# Altium PCB PCB1.PcbDoc (part 2 of 2)
Units mil, origin at the board's own origin, x right, y up, seen from the top; angles counter-clockwise.
Board outline 3937.01 x 3937.01 mil, 4 copper layers (Top Layer, Int1 (GND), Int2 (PWR), Bottom Layer), stack 61.754 mil thick; 139 components, 114 nets, 575 pads, 284 vias.
Unrouted connection lines stored in the file: 12.
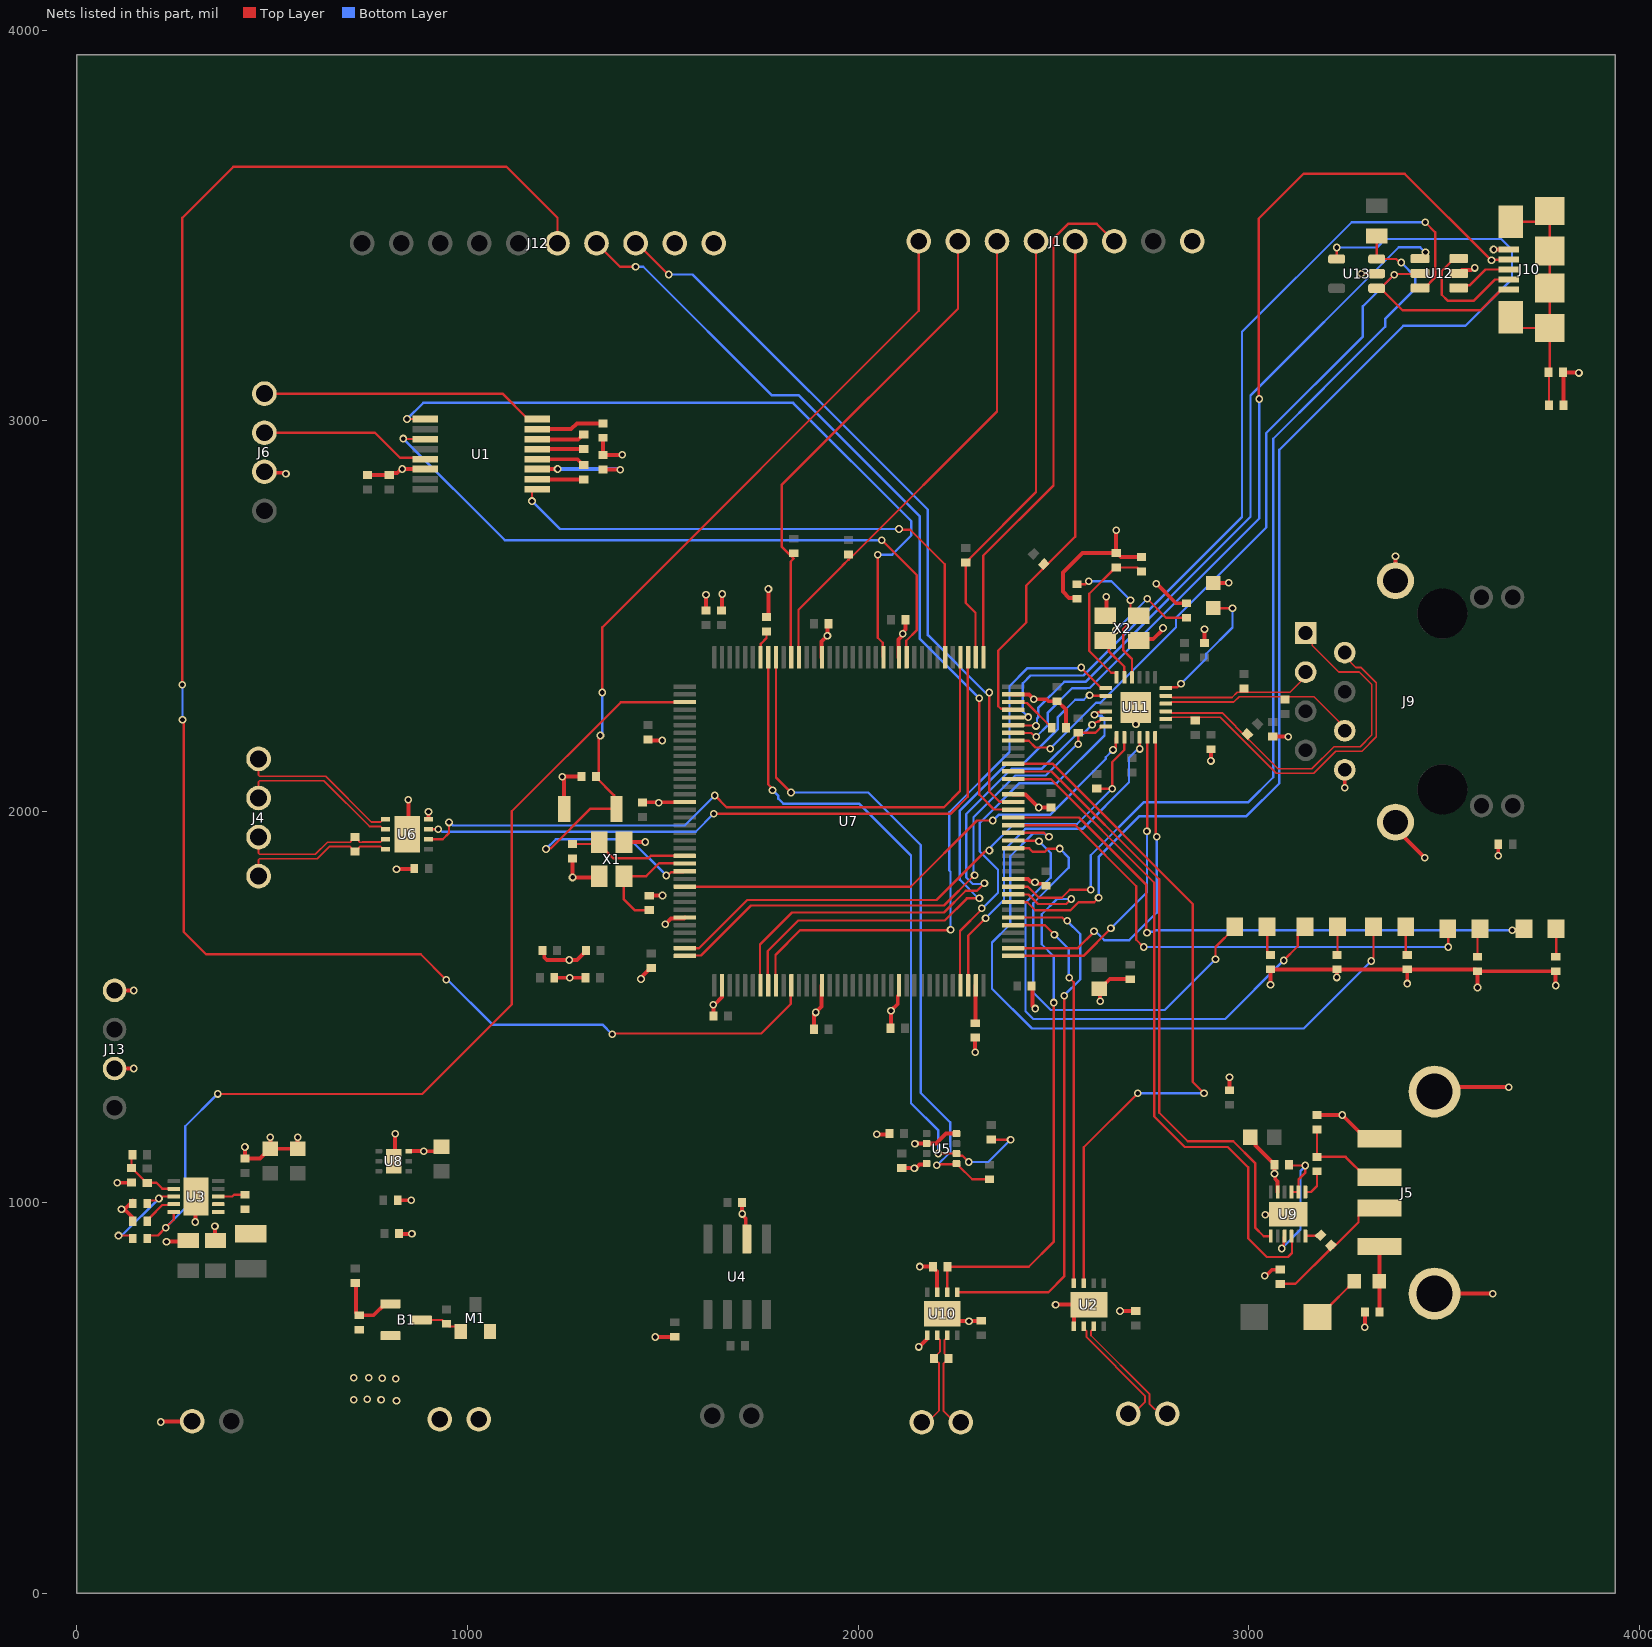
[diagram p4: the nets of this part, all layers, seen from the top]

## Via types
v1: diameter 19.68, hole 11.81, Top Layer to Bottom Layer, tented both sides, 284 vias

## Nets (pads, with @x,y where several pads share a name; then routed paths per layer and width w, separated by ;. In a path a pad name is that pad's centre, name@x,y a point inside that pad or via, vN(x,y) a via of type N, cw(c..) or ccw(c..) an arc to the next point about the centre after c; other vN are vias at no path point) (continued)
EXT_PB1: J12.6 U7.47 | length 4704.4
  Top Layer w5.94: v1(270,2325) 270,3520 400.59,3650.59 1099.41,3650.59 1230,3520 J12.6@1230,3455 ; v1(270.41,2235.11) 273.43,2232.09 273.43,1692.12 330.71,1634.84 880.16,1634.84 v1(945,1570) ; v1(1370,1430) 1372.09,1432.09 1751.83,1432.09 1827.36,1507.62 U7.47@1827.36,1554.92
  Bottom Layer w5.94: v1(270,2325) 270.41,2324.59 v1(270.41,2235.11) ; v1(945,1570) 948.7,1570 1063.7,1455 1345,1455 v1(1370,1430)
EXT_PG7: J12.7 U7.92 | length 1993.9
  Top Layer w5.94: J12.7@1330,3455 1390,3395 v1(1430,3395) ; v1(2310,2290) 2310,2043.35 2347.62,2005.73 2393.88,2005.73 U7.92@2395.08,2004.53
  Bottom Layer w5.94: v1(1430,3395) 1449.37,3395 1778.22,3066.15 1847.23,3066.15 2157.69,2755.7 2157.69,2442.31 v1(2310,2290)
EXT_PG8: J12.8 U7.93 | length 1893.9
  Top Layer w5.94: J12.8@1430,3455 1433.36,3455 1513.36,3375 v1(1515,3375) ; v1(2335,2305) 2335,2051.99 2361.58,2025.42 2393.88,2025.42 U7.93@2395.08,2024.21
  Bottom Layer w5.94: v1(1515,3375) 1575.79,3375 2178.15,2772.64 2178.15,2451.85 2325,2305 v1(2335,2305)
GND: B1.2 C1.1 C2.1 C4.1 C5.1 C7.1 C8.1 C9.1 C10.1 C11.1 C12.2 C13.1 C14.1 C17.2 C18.1 C19.1 C20.1 C21.2 C22.2 C23.1 C24.1 C25.2 C26.2 C27.1 C28.1 C29.1 C30.1 C31.1 C32.1 C33.1 C34.1 C35.1 C36.2 C37.2 C38.2 C39.2 C40.2 C41.2 C42.2 C43.2 C44.2 C45.2 C46.2 C47.2 C48.2 C49.1 C50.2 C51.2 C52.1 C53.1 C54.1 C55.1 C56.2 C57.1 C58.1 C59.1 C60.1 C61.1 C62.1 C63.1 C64.2 J1.8 J5.04 J5.SH J6.2 J8.2 J9.8 J9.S1 J9.S2 J10.5 J11.2 J12.9 J12.10 J13.2 J13.4 R3.1 R11.2 R14.1 R20.2 R21.1 R26.2 R30.1 R32.1 R33.1 R34.1 R35.1 R36.1 SW2.1 U1.14 U2.5 U3.11 U4.2 U5.1 U5.5 U5.7 U6.4 U6.9 U7.16 U7.31 U7.38 U7.51 U7.61 U7.83 U7.94 U7.107 U7.120 U7.130 U8.3 U9.5 U9.13 U10.3 U10.5 U11.25 U12.2 U13.2 X1.2 X1.4 X2.2 X2.4 | length 7385
  Top Layer w5.94: U11.25@2710.47,2266.77 2710.63,2266.61 v1(2710.63,2223.43) ; v1(3287.4,3376.97) U13.2@3326.77,3376.97
  Top Layer w10: J13.2@96.46,1342.52 v1(145.67,1342.52) ; J13.4@96.46,1542.52 96.56,1542.42 145.57,1542.42 v1(145.67,1542.32) ; v1(103.44,1050.27) 137.68,1050.27 137.99,1050.59 R3.1@139.76,1050.59 ; C12.2@142.99,960 142.99,961.77 125.11,979.65 116.8,979.65 v1(114.17,982.28) 116.8,984.91 124.68,984.91 142.99,1003.23 C17.2@142.99,1005 ; v1(215,438) 216,439 294,439 J11.2@295,440 ; v1(229.33,899.61) 282.44,899.61 C14.1@285,902.17 ; v1(303.15,949.8) 303.15,1013.15 U3.11@305,1015 ; v1(353.35,938.98) 353.35,903.82 C13.1@355,902.17 ; v1(430.12,1141.73) v1(430.12,1141.73) 430.06,1112.07 C11.1@430,1112.01 468.23,1112.01 493.43,1137.2 C10.1@495,1137.2 ; J6.2@480,2870 482.5,2867.5 532.5,2867.5 v1(535,2865) ; v1(495.08,1166.34) 495.08,1137.28 C10.1@495,1137.2 ; v1(564.96,1166.34) C9.1@565,1137.2 C9.1@565,1137.2 C10.1@495,1137.2 ; C5.1@744.09,2861.81 C4.1@799.21,2861.81 804.25,2866.85 819.94,2866.85 830.06,2876.97 v1(832.68,2876.97) ; U8.3@811.11,1105.59 814.5,1108.98 v1(814.5,1175.5) ; v1(818.11,1852.36) 819.09,1853.35 862.6,1853.35 C21.2@863.58,1854.33 ; C23.1@821.11,1005.59 821.2,1005.5 v1(856,1005.5) ; C33.1@824.62,920.59 825.71,919.5 v1(857.5,919.5) ; v1(832.68,2876.97) U1.14@892,2877 ; U6.9@845.12,1942.2 848.43,1945.51 v1(848.43,2030.51) ; U8.3@849.5,1131.18 849.64,1131.04 887.66,1131.04 v1(887.8,1130.91) 922.05,1130.91 C24.1@933.07,1141.93 ; v1(900,2000) 900,1980.83 U6.4@900.24,1980.59 ; C54.1@1191.5,1645 1196.2,1640.3 1196.2,1626.64 1202.62,1620.22 1279.98,1620.22 1302.99,1643.23 C55.1@1302.99,1645 ; C53.1@1222.01,1575 C52.1@1301.5,1575 ; SW2.1@1247.05,2006.89 1247.05,2080.93 1242.13,2085.85 v1(1242.13,2089.57) 1291.06,2089.57 C31.1@1291.5,2090 ; C35.1@1268.7,1880.12 v1(1268.7,1831.69) 1333.7,1831.69 X1.2@1337.01,1835 ; C7.1@1346.46,2956.89 C2.1@1346.46,2913.19 1346.56,2913.29 1395.57,2913.29 v1(1395.67,2913.39) ; X1.4@1400,1921.61 1400.63,1922.24 v1(1454.72,1922.24) ; v1(1443.9,1571.85) 1446.53,1574.48 1446.53,1578.3 1468.23,1600 C44.2@1470,1600 ; C41.2@1447.83,2023.43 1448.62,2024.21 U7.16@1554.92,2024.21 ; C51.2@1461.61,2184.45 1463.98,2182.09 v1(1498.03,2182.09) ; C34.1@1465,1785 1465.43,1785.43 v1(1499.02,1785.43) ; v1(1480.32,655.51) 1480.56,655.75 1529.76,655.75 C20.1@1530,655.99 ; v1(1505.91,1711.61) 1521.08,1726.79 1553.56,1726.79 U7.31@1556.1,1729.33 ; C37.2@1610,2514.51 1610.24,2514.74 v1(1610.24,2555.12) ; C43.2@1629.13,1477.36 1628.94,1477.56 v1(1628.94,1505.91) 1631.56,1505.91 1650.87,1525.21 1650.87,1554.8 U7.38@1651.38,1555.32 ; C38.2@1650.2,2514.51 1651.57,2515.89 v1(1651.57,2557.09) ; C19.1@1702.56,1000 1702.66,999.9 1702.66,970.57 v1(1702.76,970.47) 1702.76,967.85 1711.9,958.71 1711.9,909.41 U4.2@1715,906.31 ; R11.2@1765,2498.5 1770,2503.5 v1(1770,2570) ; C45.2@1887.01,1442.91 1886.81,1443.11 1886.81,1479.57 1890.84,1483.6 v1(1890.84,1486.22) ; v1@1892.86,1488.24 1906.1,1501.48 U7.51@1906.1,1554.92 ; U7.130@1906.1,2395.08 1906.1,2435.1 v1(1921,2450) 1921,2478.57 C39.2@1923.43,2481 ; v1(2047.24,1174.21) 2078.15,1174.21 C18.1@2080.12,1176.18 ; C46.2@2082.87,1445.87 2083.66,1446.65 2083.66,1490.69 2100.96,1507.99 2100.96,1528.72 2103.62,1531.38 U7.61@2103.62,1554.92 ; U7.120@2102.95,2395.08 2102.95,2440.77 2114.17,2451.99 v1(2114.17,2455.71) 2114.17,2459.43 2120.87,2466.12 C36.2@2120.87,2491.14 ; C63.1@2111.22,1087.99 2111.61,1087.6 v1(2143.7,1087.6) 2147.42,1087.6 2156.44,1096.62 2172.21,1096.62 U5.5@2175,1099.41 ; v1(2145,1150) 2145.3,1150.3 2174.7,1150.3 U5.7@2175,1150.59 2198.51,1150.59 2224.1,1176.18 U5.1@2251.38,1176.18 ; v1(2155,630) 2175.51,650.51 2175.51,658.78 U10.5@2176.61,659.88 ; v1(2157.48,835.63) 2190.87,835.63 R14.1@2191.5,835 2191.5,833.23 2201.5,823.23 2201.5,770.83 U10.3@2202.2,770.12 ; U10.5@2215,715 2234.13,695.87 v1(2283.46,695.87) 2284.04,696.44 2314.43,696.44 C1.1@2315,697.01 ; v1(2299.21,1383.86) C32.1@2299.21,1421.65 ; U7.83@2395.08,1827.36 2434.45,1827.36 2440.79,1821.02 2450.55,1821.02 v1(2452.4,1819.17) ; U7.107@2395.08,2299.8 2437.44,2299.8 v1(2449.47,2287.77) 2481.33,2287.77 2486.42,2282.68 C48.2@2508.86,2282.68 2510.63,2282.68 2532.01,2261.3 C22.2@2532.01,2215 ; U7.94@2396.26,2044.29 2396.77,2043.78 2428.45,2043.78 v1(2461.66,2010.57) ; C42.2@2443.7,1554.13 2445.87,1551.97 2445.87,1502.95 v1(2452.76,1496.06) ; v1@2452.4,1820.87 2453.33,1820.87 2458.72,1815.47 2475.28,1815.47 C47.2@2480.32,1810.43 ; v1@2461.38,2010.28 2461.89,2010.79 2492.88,2010.79 C50.2@2493.11,2011.02 ; v1(2504.92,738.19) 2589.81,738.19 U2.5@2590,738 2581.12,738 2551.61,708.49 U2.5@2551.61,682.88 ; C59.1@2560,2545 2557.62,2547.38 2539.32,2547.38 2523.62,2563.08 2523.62,2612.2 2573.43,2662.01 C61.1@2660,2662.01 v1(2660,2720) ; C49.1@2617.13,1546.26 2619.09,1544.29 v1(2619.09,1514.76) ; C49.1@2618.7,1546.26 2643.7,1571.26 C40.2@2695.87,1571.26 ; X2.4@2631.69,2501.5 2635,2504.8 v1(2635,2550) ; C61.1@2661.77,2662.01 2671.77,2652.01 C60.1@2725,2652.01 ; v1(2670,722.01) C8.1@2710,722.01 ; X2.2@2718.31,2438.5 2721.64,2441.83 2755.01,2441.83 2778.15,2464.97 2778.15,2468.15 v1(2780,2470) ; v1(2762.8,2583.66) 2812.95,2533.5 C62.1@2840,2533.5 ; C58.1@2885.24,2432.99 2886.22,2433.98 v1(2886.22,2466.97) ; v1(2902.56,2129.92) C56.2@2902.56,2159.84 ; R26.2@2908.46,2585.2 2908.9,2585.63 v1(2947.83,2585.63) ; C28.1@2950,1287.01 v1(2950,1320) ; C29.1@3002.76,1166.5 3016.26,1152.99 3016.26,1145.59 3058.54,1103.31 3060.32,1103.31 3065.35,1098.27 C30.1@3065.35,1096.5 ; v1(3040,812.19) 3041.85,814.04 3045.57,814.04 3059.05,827.52 3079.01,827.52 C27.1@3080,828.5 ; v1(3041.34,968.5) 3098.5,968.5 U9.13@3100,970 ; v1(3055.12,1557.09) 3055.12,1596.38 R32.1@3055,1596.5 R33.1@3225,1596.5 ; C57.1@3061.22,2192.13 3100.2,2192.13 v1(3100.39,2191.93) ; C30.1@3065.35,1094.72 v1(3065.35,1073.23) 3067.21,1071.37 3067.21,1060.04 3073.43,1053.82 U9.5@3073.43,1026.5 ; C26.2@3172.36,1225 C26.2@3173.86,1223.5 v1(3238.7,1223.5) 3299.41,1162.8 J5.04@3334.06,1162.8 ; v1(3225,1575.75) R33.1@3225,1596.5 ; v1(3245.08,2061.02) J9.8@3245.08,2107.13 ; v1(3296.26,680.12) 3296.46,680.32 3296.46,719.29 C25.2@3296.65,719.49 ; J9.S1@3375,1973.07 3375,1956.92 v1(3450,1881.92) ; J9.S2@3375,2591.18 v1(3375,2653.54) ; v1(3405,1560) R34.1@3405,1596.5 ; J5.SH@3475,766.34 v1(3623.66,766.34) ; J5.SH@3475,1283.66 3486.34,1295 v1(3665,1295) ; U12.2@3536.61,3377.95 3545.26,3386.6 3568.9,3386.6 3574.04,3391.73 v1(3577.76,3391.73) ; v1(3585,1550) R35.1@3585,1591.5 ; v1(3625.98,3438.98) J10.5@3664.67,3438.96 ; v1(3637.8,1886.81) 3637.99,1887.01 3637.99,1916.14 R21.1@3638.19,1916.34 ; v1(3785,1555) R36.1@3785,1591.5 R35.1@3585,1591.5 ; C64.2@3805,3040 3805,3123.5 R30.1@3803.5,3125 3804.49,3124.02 3843.5,3124.02 v1(3844.49,3123.03) ; R33.1@3225,1596.5 R34.1@3405,1596.5 ; R34.1@3405,1596.5 3580,1596.5 R35.1@3585,1591.5
  other v1: 817.91,492.13 708.66,495.08 778.54,495.08 742.96,495.86 815.94,548.23 781.5,550.2 708.66,551.18 747.05,551.18 2083.66,1490.16 1261.75,1575 1260.56,1620.22 1489.17,2022.64
I2C_SCL: R10.1 U5.4 U7.136 | length 1763.2
  Top Layer w5.94: U7.136@1789.17,2395.47 1789.17,2087.8 v1(1827.76,2049.21) ; v1(2200.65,1095) 2202.85,1097.2 2249.17,1097.2 U5.4@2251.38,1099.41 2252.17,1099.41 2258.05,1093.52 2258.05,1092.73 2291.73,1059.06 R10.1@2328.71,1059.06
  Bottom Layer w5.94: v1(1827.76,2049.21) 2025.59,2049.21 2160,1914.8 2160,1279.96 2235.24,1204.72 2235.24,1128.41 2201.83,1095 v1(2200.65,1095)
I2C_SDA: R9.1 U5.3 U7.137 | length 1831.3
  Top Layer w5.94: U7.137@1769.49,2395.47 1769.49,2069.86 1780.51,2058.84 v1(1780.51,2055.12) ; v1(2205,1125) U5.3@2251.38,1125 2257.27,1119.11 2266.72,1119.11 v1(2282.48,1103.35) ; R9.1@2340.55,1160.83 2340.94,1160.43 v1(2389.76,1160.43)
  Bottom Layer w5.94: v1(1780.51,2055.12) 1795.5,2040.13 1795.5,2033.03 1807.86,2020.67 2001.97,2020.67 2135,1887.64 2135,1253.78 2205,1183.78 v1(2205,1125) ; v1(2282.48,1103.35) 2332.68,1103.35 v1(2389.76,1160.43)
JTDI: J1.4 R15.1 U7.110 | length 1150.8
  Top Layer w5.94: U7.110@2299.8,2395.08 2299.8,2509.22 2275,2534.02 R15.1@2275,2637.95 2276.77,2637.95 2283.84,2645.02 2283.84,2646.79 2455,2817.95 J1.4@2455,3460
JTDO: J1.3 R17.1 U7.133 | length 1275.5
  Top Layer w5.94: U7.133@1847.05,2395.08 1847.05,2517.05 1959.66,2629.66 1959.66,2630.45 1974.21,2645 1975,2645 ; 1975.79,2645 2355,3024.21 J1.3@2355,3460
LED_1: D1.1 U7.87 | length 1183.8
  Top Layer w5.94: U7.87@2396.65,1906.1 2396.75,1906 2437.47,1906 2445.95,1897.53 2477.95,1897.53 2485.93,1905.51 2515.26,1905.51 v1@2515.75,1906 ; v1(2914.37,1622.05) 2914.37,1653.74 2963.66,1703.03 D1.1@2963.66,1705
  Bottom Layer w5.94: v1(2515.75,1905.51) 2538.39,1882.87 2538.39,1856.3 2447.83,1765.75 2447.83,1536.97 2492.62,1492.19 2784.51,1492.19 v1(2914.37,1622.05)
LED_2: D2.1 U7.88 | length 1379.5
  Top Layer w5.94: U7.88@2397.44,1926.18 2398.43,1925.2 2461.61,1925.2 v1(2462.6,1924.21) ; v1(3088.58,1619.09) 3124.98,1655.49 3124.98,1686.32 D2.1@3143.66,1705
  Bottom Layer w5.94: v1(2462.6,1924.21) 2492.67,1894.14 2492.67,1831.25 2428.05,1766.64 2428.05,1489.27 2447.83,1469.49 2938.98,1469.49 v1(3088.58,1619.09)
LED_3: D3.1 U7.89 | length 1755
  Top Layer w5.94: U7.89@2396.26,1945.87 2474.63,1945.87 2484.47,1936.02 v1(2488.19,1936.02) ; v1(3312.99,1617.8) 3312.99,1621.52 3318.66,1627.19 D3.1@3318.66,1705
  Bottom Layer w5.94: v1(2488.19,1936.02) 2484.47,1936.02 2476.5,1943.99 2446.95,1943.99 2388.78,1885.83 2388.78,1711.65 2342.42,1665.3 2342.42,1546.76 2444.3,1444.88 3140.07,1444.88 v1(3312.99,1617.8)
LED_4: D4.1 U7.90 | length 1370.3
  Top Layer w5.94: U7.90@2396.26,1965.55 2555.12,1965.55 2711.61,1809.06 2711.61,1672.24 v1(2730.32,1653.54) ; D4.1@3508.66,1700 3510.15,1698.51 v1(3510.15,1653.54)
  Bottom Layer w5.94: v1(2730.32,1653.54) v1(3510.15,1653.54)
LED_5: D5.1 U7.91 | length 1504.5
  Top Layer w5.94: U7.91@2396.26,1985.24 2564.68,1985.24 2737.33,1812.59 2737.33,1691.79 v1(2738.96,1690.16) ; v1(3674.21,1696.85) 3700.51,1696.85 D5.1@3703.66,1700
  Bottom Layer w5.94: v1(2738.96,1690.16) 2741.59,1692.79 2756.62,1692.79 2760.68,1696.85 v1(3674.21,1696.85)
NetB1_1: B1.1 R19.2 R20.1 | length 179.8
  Top Layer w10: R19.2@712.5,794 714.27,792.23 714.27,718.08 721.34,711.01 759.14,711.01 788.13,740 B1.1@802.5,740
NetB1_3: B1.3 M1.1 R18.2 | length 112.8
  Top Layer w5.94: B1.3@882.46,699 934.27,699 944.09,689.17 R18.2@945.87,689.17 952.94,682.1 969.88,682.1 982.7,669.29 M1.1@982.7,669
NetC2_2: C2.2 U1.3 | length 258.4
  Top Layer w10: U1.3@1178,2877 v1(1230.32,2876.97) ; C2.2@1346.46,2876.18 1347.05,2875.59 1390.16,2875.59 v1(1390.75,2875)
  Bottom Layer w10: v1(1230.32,2876.97) 1369.09,2876.97 1369.21,2876.85 1388.89,2876.85 v1(1390.75,2875)
NetC3_1: C3.1 U1.4 | length 125.3
  Top Layer w5.94: C3.1@1295.47,2887.4 C3.1@1297.24,2887.4
  Top Layer w10: U1.4@1178,2902 1280.87,2902 C3.1@1295.47,2887.4
NetC3_2: C3.2 U1.2 | length 119.5
  Top Layer w10: U1.2@1178,2851 1178.3,2850.7 1296.94,2850.7 C3.2@1297.24,2850.39
NetC6_1: C6.1 U1.6 | length 124.3
  Top Layer w10: U1.6@1178,2953 1283.32,2953 1295.47,2965.16 C6.1@1297.24,2965.16
NetC6_2: C6.2 U1.5 | length 119.3
  Top Layer w10: U1.5@1178,2928 1178.07,2928.07 C6.2@1297.24,2928.15 C6.2@1297.24,2928.15
NetC7_2: C7.2 U1.7 | length 174.6
  Top Layer w10: U1.7@1178,2979 1265.12,2979 1280.02,2993.9 C7.2@1346.46,2993.9
NetC12_1: C12.1 U3.4 | length 83.3
  Top Layer w5.94: C12.1@180,960 186.38,960 186.99,960.61 186.99,961.6 218.56,993.17 245.96,993.17 U3.4@248.11,995.32
NetC15_2: C15.2 R1.2 R3.2 U3.2 | length 166.9
  Top Layer w5.94: R3.2@139.34,1088.03 R3.2@139.76,1087.6 139.76,1119.09 R1.2@142.72,1122.05 ; R3.2@139.77,1088.46 178.23,1050 C15.2@180,1050 203.5,1050 218.82,1034.68 U3.2@248.11,1034.68
NetC16_1: C16.1 L1.1 U3.6 U3.7
NetC16_2: C16.2 U3.8 | length 70
  Top Layer w5.94: U3.8@361.89,1015 397.5,1015 402,1019.5 C16.2@430,1019.5
NetC17_1: C17.1 R2.1 U3.3 | length 254.9
  Top Layer w5.94: v1(106.5,915) 135.84,915 142.91,907.93 R2.1@142.91,907.48 ; C17.1@180,1005 201.28,1005 206.28,1010 213.72,1010 218.72,1015 U3.3@248.11,1015
  Bottom Layer w5.94: v1(106.5,915) 109.13,917.63 117.63,917.63 v1(210,1010)
NetC22_1: C22.1 U7.106 | length 126.9
  Top Layer w5.94: U7.106@2396.26,2280.51 2398.8,2277.97 2432.03,2277.97 2486.16,2223.84 2487.93,2223.84 2495,2216.77 C22.1@2495,2215
NetC30_2: C30.2 U9.2 U9.3 U9.9 | length 408.3
  Top Layer w5.94: v1(3083.66,881.89) 3083.66,885.61 3089.19,891.14 3089.19,911.55 U9.9@3091.14,913.5 ; C30.2@3102.36,1096.5 3104.46,1094.4 v1(3144.4,1094.4) 3144.4,1076.25 3126.57,1058.43 U9.2@3126.57,1026.5 U9.3@3108.86,1026.5
  Bottom Layer w5.94: v1(3083.66,881.89) 3132.03,930.26 3132.03,1080.24 3144.4,1092.61 v1(3144.4,1094.4)
NetC32_2: C32.2 U7.71 | length 96.5
  Top Layer w10: C32.2@2299.21,1458.66 2299.51,1458.96 2299.51,1554.63 U7.71@2299.8,1554.92
NetC59_2: C59.2 U11.4 X2.3 | length 393.3
  Top Layer w5.94: C59.2@2560,2582.01 2580.72,2582.01 2588.71,2590 v1(2590,2590) ; v1(2696.85,2541.34) 2696.85,2520.18 X2.3@2713.97,2503.06 ; U11.4@2700.63,2343.54 2700.63,2390.94 2677.78,2413.8 2677.78,2466.87 2712.4,2501.5 X2.3@2718.31,2501.5
  Bottom Layer w5.94: v1(2590,2590) 2648.19,2590 v1(2696.85,2541.34)
NetC60_2: C60.2 C61.2 U11.6 | length 416.1
  Top Layer w5.94: U11.6@2661.26,2343.54 2661.26,2353.26 2659.11,2355.41 2647.23,2355.41 2591.16,2411.48 2591.16,2557.94 2658.23,2625 C61.2@2660,2625 2713.23,2625 2723.23,2615 C60.2@2725,2615
NetC62_2: C62.2 U11.5 X2.1 | length 390.1
  Top Layer w5.94: v1(2658.81,2463.84) 2656.28,2461.32 2656.28,2457.19 2637.6,2438.5 X2.1@2631.69,2438.5 2640.75,2429.45 2640.75,2411.42 2680.94,2371.22 U11.5@2680.94,2343.54 ; v1(2739.71,2544.74) 2787.95,2496.5 C62.2@2840,2496.5
  Bottom Layer w5.94: v1(2658.81,2463.84) v1(2739.71,2544.74)
NetC64_1: C64.1 J10.SH1 J10.SH2 J10.SH3 J10.SH4 J10.SH5 J10.SH6 R30.2 | length 723.1
  Top Layer w5.94: J10.SH1@3669.61,3265.71 3697.17,3238.15 J10.SH3@3770,3238.15 ; J10.SH2@3669.61,3509.8 3742.44,3509.8 J10.SH6@3770,3537.36 J10.SH5@3770,3435 J10.SH4@3770,3340.51 J10.SH3@3770,3238.15 ; C64.1@3767.99,3040 3767.99,3123.5 R30.2@3766.5,3125 3770,3128.5 J10.SH3@3770,3238.15
NetD1_2: D1.2 R32.2 | length 76
  Top Layer w5.94: D1.2@3046.34,1705 3046.34,1640.57 3053.41,1633.5 R32.2@3055,1633.5
NetD2_2: D2.2 R33.2 | length 72.1
  Top Layer w5.94: R33.2@3225,1633.5 3226.34,1634.84 D2.2@3226.34,1705
NetD3_2: D3.2 R34.2 | length 73
  Top Layer w5.94: D3.2@3401.34,1705 3401.34,1637.17 R34.2@3405,1633.5
NetD4_2: D4.2 R35.2 | length 74.1
  Top Layer w5.94: R35.2@3585,1628.5 3585,1693.66 D4.2@3591.34,1700
NetD5_2: D5.2 R36.2 | length 72.1
  Top Layer w5.94: R36.2@3785,1628.5 3786.34,1629.84 D5.2@3786.34,1700
NetD6_1: D6.1 R6.2 | length 132.7
  Top Layer w5.94: D6.1@3175.2,706.69 3205.69,737.19 3208.53,737.19 3254.23,782.89 3255.02,782.89 3269.57,797.44 R6.2@3269.57,798.23
NetJ8_1: J8.1 M1.2
NetR7_2: R7.2 U9.1 | length 73.5
  Top Layer w5.94: U9.1@3144.29,1026.5 3158.39,1026.5 3173.86,1041.97 R7.2@3173.86,1079.49
NetR8_2: R8.2 U9.12 | length 40.2
  Top Layer w5.94: U9.12@3144.29,913.5 3145.47,914.68 3182.22,914.68 R8.2@3183.48,915.93
NetR11_1: R11.1 U7.138 | length 71.5
  Top Layer w5.94: U7.138@1749.83,2396.28 1750.14,2396.6 1750.14,2429.5 1765,2444.36 R11.1@1765,2461.5
NetR26_1: R26.1 U11.24 | length 340.5
  Top Layer w5.94: U11.24@2787.24,2315.98 2789.39,2318.13 2816.37,2318.13 v1(2825.87,2327.63) ; R26.1@2908.46,2521.1 2908.9,2520.67 v1(2957.68,2520.67)
  Bottom Layer w5.94: v1(2825.87,2327.63) 2890.65,2392.41 2890.65,2404.03 2957.68,2471.06 v1(2957.68,2520.67)
NJTRST: J1.2 R13.1 U7.134 | length 1268.4
  Top Layer w5.94: U7.134@1827.36,2395.08 1827.36,2640.32 1835,2647.95 1834.21,2647.95 1803.72,2678.44 1803.72,2835.86 2255,3287.14 J1.2@2255,3460
NRST: C31.2 J1.1 SW2.2 U7.25 | length 2446.1
  Top Layer w5.94: v1(1200.79,1904.53) 1202.69,1906.43 1213.52,1906.43 1314.96,2007.87 SW2.2@1379.92,2007.87 ; v1(1340,2195) 1340,2193.36 1335.57,2188.93 1335.57,2097.07 C31.2@1328.5,2090 1328.5,2088.23 1375,2041.73 1375,2012.8 SW2.2@1379.92,2007.87 ; v1(1345,2305) 1345,2472.28 2155,3282.28 J1.1@2155,3460 ; SW2.2@1380.91,2006.89 SW2.2@1379.92,2007.87 ; v1(1508.86,1836.61) 1512.58,1836.61 1520.86,1844.9 1552.77,1844.9 U7.25@1554.92,1847.05
  Bottom Layer w5.94: v1(1200.79,1904.53) 1225.39,1929.13 1416.34,1929.13 v1(1508.86,1836.61) ; v1(1340,2195) 1345,2200 v1(1345,2305)
OSC_IN: C35.2 U7.23 X1.1 | length 306.5
  Top Layer w5.94: C35.2@1268.7,1917.13 1332.52,1917.13 X1.1@1337.01,1921.61 ; X1.1@1337.01,1915.71 1355.69,1897.03 1356.66,1897.03 1373.22,1880.47 1462.64,1880.47 1468.98,1886.81 U7.23@1556.1,1886.81
OSC_OUT: C34.2 U7.24 X1.3 | length 305
  Top Layer w5.94: C34.2@1465,1747.99 1427.2,1747.99 1400,1775.2 X1.3@1400,1835 1457.41,1835 1490.23,1867.81 1553.84,1867.81 U7.24@1554.92,1866.73
OTG_FS_D_N: U7.103 U12.4 | length 1801.4
  Top Layer w5.94: U7.103@2395.11,2221.03 2395.67,2220.47 2453.74,2220.47 v1(2454.72,2219.49) ; U12.4@3437.8,3415.35 3443.13,3415.35 3451.77,3424 v1(3451.77,3432.09)
  Bottom Layer w5.94: v1(2454.72,2219.49) 2457.34,2222.1 2457.34,2238.24 2460.31,2241.21 2460.31,2265.43 2527.14,2332.26 2581.27,2332.26 3003.84,2754.83 3003.84,3065.45 3383.27,3444.88 3438.05,3444.88 3450.84,3432.09 v1(3451.77,3432.09)
OTG_FS_D_P: U7.104 U12.6 | length 2130.8
  Top Layer w5.94: U7.104@2395.08,2240.75 2395.96,2241.63 2434.55,2241.63 v1(2435.04,2242.13) ; U12.6@3437.8,3340.55 3450,3340.55 3476.38,3366.93 3476.38,3483.27 v1(3450.93,3508.72)
  Bottom Layer w5.94: v1(2435.04,2242.13) 2421.26,2255.91 2421.26,2328.74 2440.98,2348.46 2576.55,2348.46 2982.28,2754.2 2982.28,2995.08 2982.28,3228.38 3262.77,3508.86 v1@3450.79,3508.86
OTG_FS_ID: J10.4 U7.102 | length 2433.6
  Top Layer w5.94: U7.102@2395.08,2201.38 2442.54,2201.38 2451.95,2191.97 v1(2455.67,2191.97) ; v1(3026.57,3056.1) 3024.61,3058.07 3024.61,3517.72 3139.76,3632.87 3398.4,3632.87 3619.58,3411.69 v1(3620.6,3411.69) 3621.43,3412.52 3663.86,3412.52 J10.4@3664.69,3413.35
  Bottom Layer w5.94: v1(2455.67,2191.97) 2485.24,2221.53 2485.24,2253.94 2547.61,2316.32 2583.83,2316.32 2584.1,2316.58 2592.17,2316.58 3026.57,2750.98 v1(3026.57,3056.1)
Power_Good: R2.2 U3.5 U7.3 | length 2404.3
  Top Layer w5.94: R2.2@180,915 207.32,915 v1(227.72,935.39) 248.11,955.79 U3.5@248.11,975.63 ; U3.5@258.94,975.63 U3.5@261.09,973.48 ; v1(360.24,1277.56) 883.85,1277.56 1113.09,1506.8 1113.09,2000.89 1392.32,2280.12 U7.3@1554.92,2280.12
  Bottom Layer w5.94: v1(227.72,935.39) 277.56,985.24 277.56,1194.88 v1(360.24,1277.56)
RD_N: J9.6 R23.2 U11.22 | length 506.2
  Top Layer w4.44: U11.22@2787.24,2276.61 2798.07,2276.61 2802.19,2280.74 2961.33,2280.74 2974.88,2294.29 3166.34,2294.29 3245.08,2215.55 J9.6@3245.08,2207.13
RD_P: J9.3 R22.2 U11.23 | length 393
  Top Layer w4.44: U11.23@2787.24,2296.3 2798.07,2296.3 2802.19,2292.18 2956.59,2292.18 2970.14,2305.73 3104.94,2305.73 3145.08,2345.87 J9.3@3145.08,2357.13
RMII_CRS_DV: U7.43 U11.11 | length 1419.1
  Top Layer w5.94: U7.43@1748.62,1554.92 1748.62,1660.04 1830.46,1741.88 2219.25,1741.88 2275.19,1797.82 2303.73,1797.82 v1(2322.83,1816.93) ; v1(2598.43,2222.44) 2602.14,2222.44 2609.17,2229.47 2612.4,2229.47 2614.58,2231.65 2617.28,2231.65 2622.87,2237.24 U11.11@2633.7,2237.24
  Bottom Layer w5.94: v1(2322.83,1816.93) 2320.87,1814.96 2293.21,1814.96 2276.03,1832.14 2276.03,1993.55 2392.7,2110.22 2470.41,2110.22 2559,2198.82 2574.8,2198.82 v1(2598.43,2222.44)
RMII_MDC: U7.27 U11.13 | length 1280.7
  Top Layer w5.94: U7.27@1554.92,1807.68 2134.45,1807.68 2304.13,1977.36 v1(2344.49,1977.36) ; v1(2651.93,2158.04) 2659.11,2165.22 2659.11,2187.85 U11.13@2661.26,2190
  Bottom Layer w5.94: v1(2344.49,1977.36) 2358.88,1991.75 2490.37,1991.75 2633.46,2134.84 2633.46,2139.57 v1(2651.93,2158.04)
RMII_MDIO: R28.2 U7.36 U11.12 | length 1427.2
  Top Layer w5.94: U7.36@1556.12,1631.72 1597.27,1631.72 1725.39,1759.84 2219.04,1759.84 2296.59,1837.39 v1(2297.61,1837.39) ; v1(2562.99,2172.24) R28.2@2562.99,2201.97 2607.28,2201.97 2622.87,2217.56 U11.12@2633.7,2217.56
  Bottom Layer w5.94: v1(2297.61,1837.39) 2295,1840 2295,1985.94 2401.57,2092.52 2479.98,2092.52 2558.73,2171.27 v1@2561.23,2173.77
RMII_REF_CLK: R37.2 U7.35 U11.14 | length 1439.8
  Top Layer w5.94: U7.35@1554.92,1650.2 1592.13,1650.2 1715.69,1773.76 2199.94,1773.76 2324.14,1897.96 2333,1897.96 v1(2335.63,1900.59) ; R37.2@2610.24,2059.06 2610.32,2058.97 v1(2650,2058.97) 2650,2127.2 2680.94,2158.15 U11.14@2680.94,2190
  Bottom Layer w5.94: 2340,1910 2397.87,1967.87 2558.9,1967.87 v1(2650,2058.97)
RMII_RXD0: U7.44 U11.8 | length 1447.3
  Top Layer w5.94: U7.44@1768.31,1554.92 1768.31,1643.31 1846.46,1721.46 2221.37,1721.46 2278.01,1778.09 2309.59,1778.09 v1(2310.04,1778.54) ; v1(2591.96,2297.77) 2592.69,2297.04 2632.96,2297.04 U11.8@2633.7,2296.3
  Bottom Layer w5.94: v1(2310.04,1778.54) 2307.09,1778.54 2260.09,1825.54 2260.09,2003.2 2379.05,2122.16 2421.37,2122.16 2510.83,2211.61 2510.83,2242.13 2555.12,2286.42 2576.88,2286.42 2588.24,2297.77 v1(2591.96,2297.77)
RMII_RXD1: U7.45 U11.7 | length 1530.8
  Top Layer w5.94: U7.45@1787.99,1554.92 1787.99,1633.46 1851.38,1696.85 2235.24,1696.85 v1(2236.22,1697.83) ; v1(2570.4,2368.91) 2570.4,2368.46 2622.87,2315.98 U11.7@2633.7,2315.98
  Bottom Layer w5.94: v1(2236.22,1697.83) 2236.22,1846.43 2232.67,1849.98 2232.67,1998.42 2386.81,2152.56 2386.81,2320.87 2433.38,2367.43 2568.92,2367.43 v1(2570.4,2368.91)
RMII_RXER: U7.69 U11.10 | length 994.7
  Top Layer w5.94: U7.69@2260.43,1554.92 2260.43,1694.88 2315.94,1750.39 v1(2315.94,1752.95) ; v1(2604.61,2248.28) 2608.33,2248.28 2614.83,2254.78 2631.55,2254.78 U11.10@2633.7,2256.93
  Bottom Layer w5.94: v1(2315.94,1752.95) 2317.95,1752.95 2357.38,1792.38 2357.38,1851.4 2310.94,1897.85 2310.94,1971.37 2412.62,2073.05 2508.05,2073.05 2630,2195 2630,2239.09 2623.36,2245.73 2607.16,2245.73 v1(2604.61,2248.28)
RMII_TX_EN: U7.70 U11.16 | length 905
  Top Layer w5.94: U7.70@2281.3,1555.32 2281.3,1682.87 v1(2325.79,1727.36) ; v1@2720.34,2160.59 U11.16@2720.31,2190
  Bottom Layer w5.94: v1(2325.79,1727.36) 2373.03,1774.61 2373.03,1901.38 2427.58,1955.93 2573.79,1955.93 2692.97,2075.11 2692.97,2137.97 2715.51,2160.51 2720.3,2160.51 v1(2720.36,2160.57)
RMII_TXD0: U7.73 U11.17 | length 807.2
  Top Layer w5.94: U7.73@2396.26,1630.91 2576.09,1630.91 v1(2646.64,1701.46) ; v1(2738.75,1949.59) 2739.37,1950.22 2739.37,2189.37 U11.17@2740,2190
  Bottom Layer w5.94: v1(2646.64,1701.46) 2739.17,1793.99 2739.17,1949.17 v1(2738.75,1949.59)
RMII_TXD1: U7.74 U11.18 | length 876.4
  Top Layer w5.94: U7.74@2395.08,1650.2 2561.35,1650.2 2603.35,1692.2 v1(2603.35,1693.9) ; U11.18@2759.68,2190 2761.73,2187.95 2761.73,1938.07 v1(2763.78,1936.02)
  Bottom Layer w5.94: v1(2603.35,1693.9) 2607.07,1693.9 2629.72,1671.26 2693.45,1671.26 2763.78,1741.59 v1(2763.78,1936.02)
RS232_EN_N: U1.1 U7.114 | length 1401
  Top Layer w5.94: v1(1165,2795) 1165,2819.47 1170.53,2825 U1.1@1178,2825 ; v1(2104.33,2723.43) 2106.35,2721.41 2132.93,2721.41 2221.06,2633.27 U7.114@2221.06,2395.08
  Bottom Layer w5.94: v1(1165,2795) 1236.57,2723.43 v1(2104.33,2723.43)
RS232_IN: J6.4 U1.8 | length 724.9
  Top Layer w5.94: J6.4@480,3070 1089,3070 1154,3005 U1.8@1178,3005
RS232_OUT: J6.3 U1.13 | length 440.2
  Top Layer w5.94: J6.3@480,2970 763.14,2970 827.67,2905.47 888.53,2905.47 U1.13@892,2902
RS232_RX: U1.9 U7.122 | length 1891.4
  Top Layer w5.94: v1(845,3005) U1.9@892,3005 ; v1(2049.62,2657.23) 2049.62,2445.35 2062.38,2432.59 2062.38,2396.28 U7.122@2063.58,2395.08
  Bottom Layer w5.94: v1(845,3005) 886.26,3046.26 1833.26,3046.26 2135.83,2743.69 2135.83,2707.09 2086.52,2657.79 v1@2049.62,2657.79
RS232_TX: U1.11 U7.119 | length 1739.1
  Top Layer w5.94: v1(835,2955) 836,2954 891,2954 U1.11@892,2953 ; v1(2060,2695) 2150,2605 2150,2464.73 2122.64,2437.37 U7.119@2122.64,2395.08
  Bottom Layer w5.94: v1(835,2955) 1095,2695 v1(2060,2695)
RS422_RX: U6.2 U7.112 | length 1801.3
  Top Layer w5.94: U6.2@900.24,1929.41 936.3,1929.41 952.31,1945.42 v1(952.31,1972.54) ; v1(1632.87,2041.34) 1632.99,2041.34 1663.39,2010.94 2218.62,2010.94 2260.43,2052.76 U7.112@2260.43,2395.08
  Bottom Layer w5.94: v1(952.31,1972.54) 954.69,1972.54 962.66,1964.57 1556.1,1964.57 v1(1632.87,2041.34)
RS422_TX: U6.3 U7.111 | length 1776.5
  Top Layer w5.94: U6.3@900.24,1955 900.37,1954.86 925.06,1954.86 v1(925.2,1954.72) ; v1(1630,1995) 2237.13,1995 2280.12,2037.99 U7.111@2280.12,2395.08
  Bottom Layer w5.94: v1(925.2,1954.72) 928.92,1954.72 934.82,1948.82 1583.82,1948.82 v1(1630,1995)
RS485_DIR_1: R14.2 U7.81 U10.2 | length 1471.1
  Top Layer w5.94: U10.2@2227.8,770.12 2227.8,814.5 2227.8,834.29 R14.2@2228.5,835 2436.09,835 2500,898.91 v1(2500,1511.41) ; U7.81@2395.08,1787.99 2435.39,1787.99 2459.79,1763.59 2532.23,1763.59 v1(2545,1776.35)
  Bottom Layer w5.94: v1(2500,1511.41) 2500,1629.92 2469.49,1660.43 2469.49,1737.2 2508.64,1776.35 v1(2545,1776.35)
RS485_DIR_2: U2.3 U7.98 | length 1817.9
  Top Layer w5.94: U7.98@2396.26,2123.03 2497.05,2123.03 2856.3,1763.78 2856.3,1307.98 v1(2884.84,1279.44) ; U2.3@2577.2,793.12 2577.2,1141 v1(2715.65,1279.44)
  Bottom Layer w5.94: v1(2715.65,1279.44) v1(2884.84,1279.44)
RS485_RX: U7.78 U10.1 | length 1374.1
  Top Layer w5.94: U10.1@2253.39,770.12 2486.84,770.12 2526.77,810.05 v1(2526.77,1529.15) ; U7.78@2395.08,1728.94 2522.26,1728.94 2530.73,1720.47 v1(2534.45,1720.47)
  Bottom Layer w5.94: v1(2526.77,1529.15) 2567.91,1570.29 2567.91,1687.01 v1(2534.45,1720.47)
RS485_RX_N: J7.1 R12.1 U10.7 | length 264.5
  Top Layer w4.44: U10.7@2227.8,659.88 2227.8,654.17 2223.91,650.29 2223.32,650.29 2220.72,647.69 2220.72,612.55 2231.1,602.17 2231.1,598.62 2223.28,590.8 2220.92,590.8 2218.32,588.2 2218.32,465.55 2246.86,437.01 J7.1@2262.4,437.01
RS485_RX_P: J7.2 R12.2 U10.6 | length 264.1
  Top Layer w4.44: J7.2@2162.4,437.01 2176.62,437.01 2206.88,467.27 2206.88,588.2 2204.28,590.8 2201.91,590.8 2194.09,598.62 R12.2@2194.09,600.39 ; R12.2@2194.09,602.17 2209.28,617.35 2209.28,647.69 2206.68,650.29 2206.09,650.29 2202.2,654.17 U10.6@2202.2,659.88
RS485_TX: U2.4 U7.77 | length 1029.4
  Top Layer w5.94: U7.77@2395.08,1709.25 2477.76,1709.25 v1(2501.97,1685.04) ; v1(2540,1575) 2551.61,1563.39 U2.4@2551.61,793.12
  Bottom Layer w5.94: v1(2501.97,1685.04) 2539.06,1647.95 2539.06,1575.94 v1(2540,1575)
RS485_TX_N: J2.1 U2.7 | length 320.2
  Top Layer w4.44: U2.7@2602.8,682.88 2602.8,677.17 2598.91,673.29 2598.32,673.29 2595.72,670.69 2595.72,659.23 2745.08,509.87 2745.08,484.25 2759.13,470.2 2765.29,470.2 2776.5,459 J2.1@2791,459
RS485_TX_P: J2.2 U2.6 | length 314.6
  Top Layer w4.44: U2.6@2577.2,682.88 2577.2,677.17 2581.09,673.29 2581.68,673.29 2584.28,670.69 2584.28,654.49 2733.64,505.14 2733.64,488.19 2704.45,459 J2.2@2691,459
RX_N: J4.3 U6.6 | length 419.6
  Top Layer w4.44: J4.3@465,2035 465,2076.68 467.6,2079.28 631.9,2079.28 749.11,1962.08 777.81,1962.08 780.41,1959.47 780.41,1958.88 784.29,1955 U6.6@790,1955
RX_P: J4.4 U6.5 | length 419.6
  Top Layer w4.44: J4.4@465,2135 465,2093.32 467.6,2090.72 636.64,2090.72 753.85,1973.52 777.81,1973.52 780.41,1976.12 780.41,1976.71 784.29,1980.59 U6.5@790,1980.59
SWCLK: J1.6 U7.109 | length 1336.2
  Top Layer w5.94: U7.109@2319.49,2395.08 2319.49,2655.12 2499.47,2835.1 2499.47,3467.36 2536.58,3504.47 2610.53,3504.47 J1.6@2655,3460
SWDIO: J1.5 R16.1 U7.105 | length 1312.1
  Top Layer w5.94: U7.105@2395.08,2260.43 2392.14,2263.37 2365.06,2263.37 2358.35,2270.07 2358.35,2412.47 2430,2484.11 2430,2578.62 2555,2703.62 J1.5@2555,3460
TD_N: J9.2 R25.2 U11.20 | length 894.8
  Top Layer w4.44: U11.20@2787.24,2237.24 2798.07,2237.24 2802.19,2241.37 2862.2,2241.37 2926.57,2241.37 3069.51,2098.43 3165.78,2098.43 3222.26,2154.9 3289.19,2154.9 3325.77,2191.48 3325.77,2330.1 3287.02,2368.85 3273.87,2368.85 3245.08,2397.64 J9.2@3245.08,2407.13
TD_P: J9.1 R24.2 U11.21 | length 985.3
  Top Layer w4.44: U11.21@2787.24,2256.93 2798.07,2256.93 2802.19,2252.81 2931.31,2252.81 3001.11,2183 3003.97,2180.15 3074.25,2109.87 3161.05,2109.87 3217.52,2166.34 3284.45,2166.34 3314.33,2196.22 3314.33,2325.36 3282.28,2357.41 3230.19,2357.41 3162.25,2425.35 3162.25,2439.96 J9.1@3145.08,2457.13
TX_N: J4.2 R5.2 U6.7 | length 395.7
  Top Layer w4.44: J4.2@465,1935 465,1893.32 467.6,1890.72 610.24,1890.72 641.57,1922.06 699.42,1922.06 702.02,1924.66 702.02,1927.02 709.84,1934.84 R5.2@711.61,1934.84 ; R5.2@713.39,1934.84 721.21,1927.02 721.21,1924.66 723.81,1922.06 730.09,1922.06 730.36,1922.33 777.81,1922.33 780.41,1924.94 780.41,1925.53 784.29,1929.41 U6.7@790,1929.41
TX_P: J4.1 R5.1 U6.8 | length 395.7
  Top Layer w4.44: J4.1@465,1835 465,1876.68 467.6,1879.28 614.97,1879.28 646.31,1910.62 699.42,1910.62 702.02,1908.02 702.02,1905.65 709.84,1897.83 R5.1@711.61,1897.83 ; R5.1@713.39,1897.83 721.21,1905.65 721.21,1908.02 723.81,1910.62 734.82,1910.62 735.1,1910.89 777.81,1910.89 780.41,1908.29 780.41,1907.7 784.29,1903.82 U6.8@790,1903.82
USB_D+: C27.2 J5.02 R8.1 | length 345.9
  Top Layer w5.94: C27.2@3080,791.5 3119.09,791.5 3209.65,882.05 R8.1@3209.65,889.76 ; R8.1@3215.28,884.13 3280.33,949.19 3280.33,966.55 3299.41,985.63 J5.02@3334.06,985.63
USB_D-: C26.1 J5.03 R7.1 | length 251.8
  Top Layer w5.94: C26.1@3173.86,1186.5 R7.1@3173.86,1116.5 3247.28,1116.5 3299.41,1064.37 J5.03@3334.06,1064.37
USB_DM: J10.2 U12.3 | length 317.8
  Top Layer w5.94: U12.3@3536.61,3415.35 3524.41,3415.35 3493.11,3384.06 3493.11,3322.83 3507.87,3308.07 3575.79,3308.07 3629.88,3362.17 J10.2@3664.69,3362.17
USB_DP: J10.3 U12.1 | length 147.6
  Top Layer w5.94: U12.1@3536.61,3340.55 3543.11,3347.05 3564.57,3347.05 3605.28,3387.76 J10.3@3664.69,3387.76
USB_FAULT: R31.2 U7.82 U13.3 | length 2466.6
  Top Layer w5.94: U7.82@2395.08,1807.68 2434.11,1807.68 2462.26,1779.53 2520.98,1779.53 2541.45,1800 v1(2595,1800) ; R31.2@3326.77,3473.43 U13.3@3326.77,3414.37 3377.19,3414.37 3386.04,3405.51 v1(3389.76,3405.51)
  Bottom Layer w5.94: v1(2595,1800) 2595,1888.61 2730.22,2023.83 2997.73,2023.83 3062.01,2088.11 3062.01,2954.72 3191.99,3084.71 3191.99,3084.92 3348.43,3241.35 3348.43,3261.15 3425.2,3337.93 3425.2,3370.08 v1(3389.76,3405.51)
USB_PWR_EN: U7.80 U13.4 | length 3090.4
  Top Layer w5.94: U7.80@2395.08,1768.31 2432.53,1768.31 2453.19,1747.65 2543.12,1747.65 2563.78,1768.31 2603.94,1768.31 v1(2615.04,1779.41) ; U13.4@3224.41,3414.37 v1(3224.41,3443.9)
  Bottom Layer w5.94: v1(2615.04,1779.41) 2615.16,1779.53 2615.16,1883.86 2719.87,1988.57 2993.49,1988.57 3077.76,2072.83 3077.76,2926.18 3395,3243.43 3553.46,3243.43 3673.23,3363.19 3673.23,3437.99 3645.67,3465.55 3349,3465.55 3327.35,3443.9 v1(3224.41,3443.9)
USB_RX: U7.97 U9.7 | length 1600.2
  Top Layer w5.94: U7.97@2395.08,2102.95 2494.49,2102.95 2770.53,1826.91 2770.53,1229.19 2843.5,1156.22 2959.92,1156.22 3015.65,1100.49 3015.65,935.37 3037.52,913.5 U9.7@3055.71,913.5
USB_TX: U7.96 U9.10 | length 1726.8
  Top Layer w5.94: U7.96@2395.08,2083.27 2492.52,2083.27 2757.77,1818.02 2757.77,1219.59 2835.63,1141.73 2945.87,1141.73 2998.03,1089.57 2998.03,907.48 3045.37,860.14 3099.9,860.14 3110.2,870.44 3110.2,911.9 U9.10@3108.73,913.37
USB_VBUS: J10.1 U7.101 U12.5 U13.1 | length 2188.8
  Top Layer w5.94: U7.101@2395.08,2181.69 2436.12,2181.69 2453.77,2164.05 2488.51,2164.05 v1(2491.14,2161.42) ; U13.1@3326.77,3339.57 U13.1@3336.61,3339.57 ; U12.5@3437.8,3377.95 3435.83,3375.98 3374.02,3375.98 v1(3372.05,3374.02) 3371.06,3374.02 U13.1@3336.61,3339.57 ; J10.1@3664.69,3336.57 3645.98,3336.57 3592.87,3283.46 3392.72,3283.46 U13.1@3336.61,3339.57
  Bottom Layer w5.94: v1(2491.14,2161.42) 2608.68,2278.96 2620.03,2278.96 2813.03,2471.96 2813.03,2496.1 3044.06,2727.13 3044.06,2969.06 3291.57,3216.57 3291.57,3293.53 v1(3372.05,3374.02)
VCC: C25.1 J5.01 R6.1 | length 167.9
  Top Layer w10: C25.1@3333.66,719.49 R6.1@3333.66,798.23 3333.66,886.81 J5.01@3334.06,887.2
pads on no net: J9. J9.7 U1.10 U2.1 U7.1 U7.2 U7.5 U7.7 U7.8 U7.9 U7.10 U7.11 U7.12 U7.13 U7.14 U7.15 U7.18 U7.19 U7.20 U7.21 U7.22 U7.26 U7.29 U7.40 U7.41 U7.42 U7.48 U7.49 U7.50 U7.53 U7.54 U7.55 U7.56 U7.57 U7.58 U7.59 U7.60 U7.63 U7.64 U7.65 U7.66 U7.67 U7.68 U7.75 U7.76 U7.79 U7.85 U7.86 U7.99 U7.100 U7.113 U7.115 U7.117 U7.118 U7.123 U7.124 U7.125 U7.126 U7.127 U7.128 U7.129 U7.132 U7.135 U7.141 U7.142 U8.2 U8.5 U9.6 U9.8 U9.11 U10.4

## Polygon pours and split planes (outlines as drawn)
3.3V on Top Layer "3.3V_L01_P065" (solid, remove dead copper, pour order 65): 879.92,1111.22 879.92,1027.56 879.92,1020.67 879.92,1013.78 1036.42,1013.78 1036.42,1111.22
5V on Top Layer "5V_L01_P037" (solid, remove dead copper, pour order 37): 476.38,859.25 586,941.5 744.5,941.5 744.5,1087.5 753,1096 788.5,1096 788.5,1039 789,1039.5 806,1039.5 806,893.5 777.5,865 628.5,865 628.5,784.4 621.5,781.5 619.52,780.19 616.5,780.5 474,781.5
NetJ8_1 on Top Layer "NETJ8_1_L01_P049" (solid, remove dead copper, pour order 49): 1136.81,696.85 1132.87,395.67 1129.92,395.67 990.16,395.67 990.16,571.85 996.06,577.76 1017.72,577.76 1017.72,696.85
GND on Top Layer "GND_L01_P048" (solid, remove dead copper, pour order 48): 685.04,691.93 687.99,691.93 843.5,691.93 843.5,524.61 981.3,524.61 981.3,393.7 952.76,393.7 685.04,393.7
12VIN on Top Layer "12VIN_L01_P042" (solid, remove dead copper, pour order 42): 348.43,384.84 347.44,580.71 514.76,580.71 514.76,566.93 514.76,383.86 351.38,383.86 348.43,383.86
12VIN on Top Layer "12VIN_L01_P045" (solid, remove dead copper, pour order 45): 924.21,869.09 924.21,707.68 1064.96,707.68 1064.96,869.09 946.85,869.09
12VIN on Top Layer "12VIN_L01_P034" (solid, remove dead copper, pour order 34): 387.5,1029.5 344,1029.5 344,1068 365.5,1089.5 452.5,1089.5 463.5,1100.5 591.5,1100.5 597.5,1094.5 597.5,1046.5 593,1042 400,1042
NetC16_1 on Top Layer "NETC16_1_L01_P035" (solid, remove dead copper, pour order 35): 345.17,998.67 347,1000.5 465.5,1000.5 504,962 504,910.5 487.5,894 402,894 394,902 394,936.5 369,961.5 346,961.5
5V on Top Layer "5V_L01_P036" (solid, remove dead copper, pour order 36): 222,861 222.5,860.5 505,860.5 505,784.5 506,783.5 503,780.5 221.5,780.5 221.5,861 222,861.5
12VIN on Bottom Layer "12VIN_L04_P041" (solid, remove dead copper, pour order 41): 1003.94,793.31 1002.95,793.31 582.68,793.31 582.68,694.88 591.54,694.88 1004.92,694.88 1004.92,793.31
12VIN on Bottom Layer "12VIN_L04_P046" (solid, remove dead copper, pour order 46): 576.77,542.32 619.09,542.32 619.09,1087.6 310.04,1087.6 310.04,542.32
3.3V on Int2 (PWR) "3.3V_L03_P064" (solid, pour order 64): 1,3937 3936.5,3937 3936.38,3936.88 3936.38,-0.1 0.51,-0.1 0.05,0.37 0.05,3936.99
5V on Int2 (PWR) "5V_L03_P060" (solid, remove dead copper, pour order 60): 762.8,3392.72 1002.95,3378.83 2989.17,3324.8 2989.17,3113.19 3450.79,3113.19 3450.79,3307.09 3674.21,3307.09 3701.77,3307.09 3701.77,2884.84 1405.51,2884.84 1400.59,2884.84 1060.91,3215.66 762.8,3219.49
5V on Int2 (PWR) "5V_L03_P019" (solid, pour order 19): 2989.17,3324.8 3450.79,3324.8 3450.79,3113.19 2989.17,3113.19
5V on Int2 (PWR) "5V_L03_P055" (solid, remove dead copper, pour order 55): 1641.73,988.19 2852.36,988.19 2852.36,1187.99 3197.83,1187.99 3197.83,851.38 2970.47,851.38 1641.73,851.38
5V on Int2 (PWR) "5V_L03_P053" (solid, pour order 53): 3097.44,855.32 3098.43,854.33 3098.43,708.66 3360.24,708.66 3360.24,720.47 3360.24,1192.91 3098.39,1192.91
5V on Int2 (PWR) "5V_L03_P051" (solid, pour order 51): 3098.43,645.67 2847.44,645.67 2845.47,647.64 2846.46,648.62 2846.46,921.26 3092.52,921.26 3098.43,915.35
5V on Int2 (PWR) "5V_L03_P063" (solid, remove dead copper, pour order 63): 238.67,1081.69 22.64,1081.69 20.67,1081.69 12.8,1081.69 13.76,3375 894.68,3375 894.68,3219.49 239.68,3219.49
5V on Int2 (PWR) "5V_L03_P054" (solid, pour order 54): 12.8,1085.89 3.94,1077.03 3.94,750 566.93,750 579.72,762.8 579.72,861.22 778.54,861.22 763.78,875.98 763.78,1022.64 240.16,1022.64 238.67,1021.15 238.67,1081.69
5V on Int2 (PWR) "5V_L03_P059" (solid, remove dead copper, pour order 59): 750.98,993.11 750.98,848.43 758.86,848.43 1684.06,848.43 1684.06,992.13 749.02,992.13
GND on Int1 (GND) "GND_L02_P056" (solid, remove dead copper, pour order 56): 1.97,0.98 2.95,1.97 2.95,3935.04 3935.04,3935.04 3937.01,3937.01 3937.01,1.97

## Text inside footprints (layer, text, board x,y; h text height)
D1: Top Overlay "+" at 3079.8,1693.19 h24; Mechanical 13 "+" at 3079.8,1693.19 h24
D2: Top Overlay "+" at 3259.8,1693.19 h24; Mechanical 13 "+" at 3259.8,1693.19 h24
D3: Top Overlay "+" at 3434.8,1693.19 h24; Mechanical 13 "+" at 3434.8,1693.19 h24
D4: Top Overlay "+" at 3624.8,1688.19 h24; Mechanical 13 "+" at 3624.8,1688.19 h24
D5: Top Overlay "+" at 3819.8,1688.19 h24; Mechanical 13 "+" at 3819.8,1688.19 h24
J5: Mechanical 13 "PCB EDGE" at 3652.17,1379.33 h50 r90
J10: Mechanical 13 "PCB Edge" at 3818.37,3592.68 h32.03 r90